# EAGLE board cpNode (EAGLE 7.7.0)
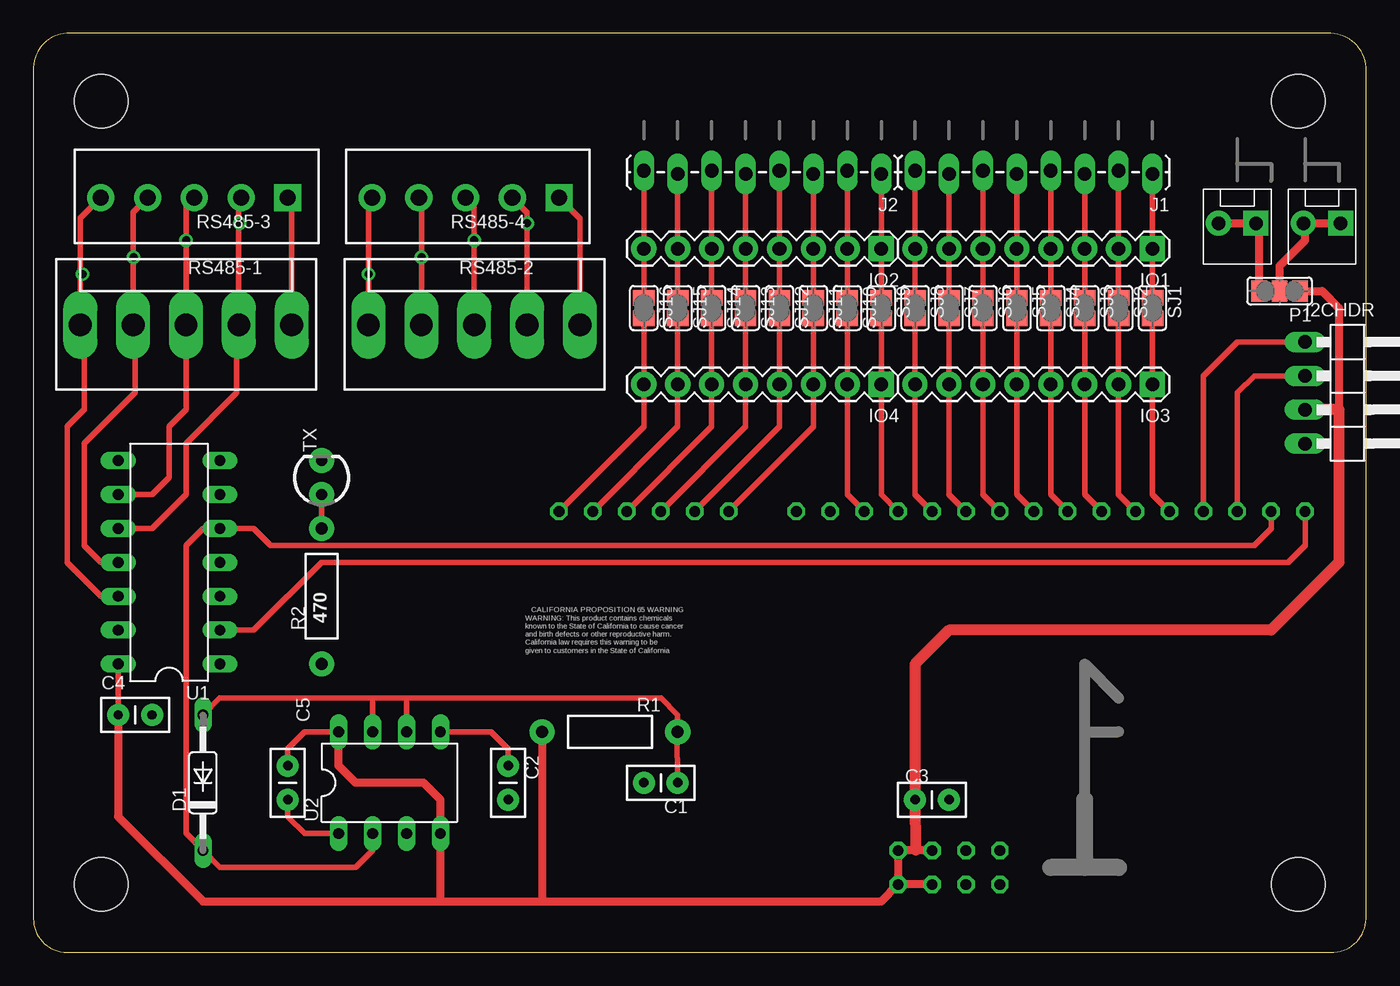
[diagram p0: board, top side]
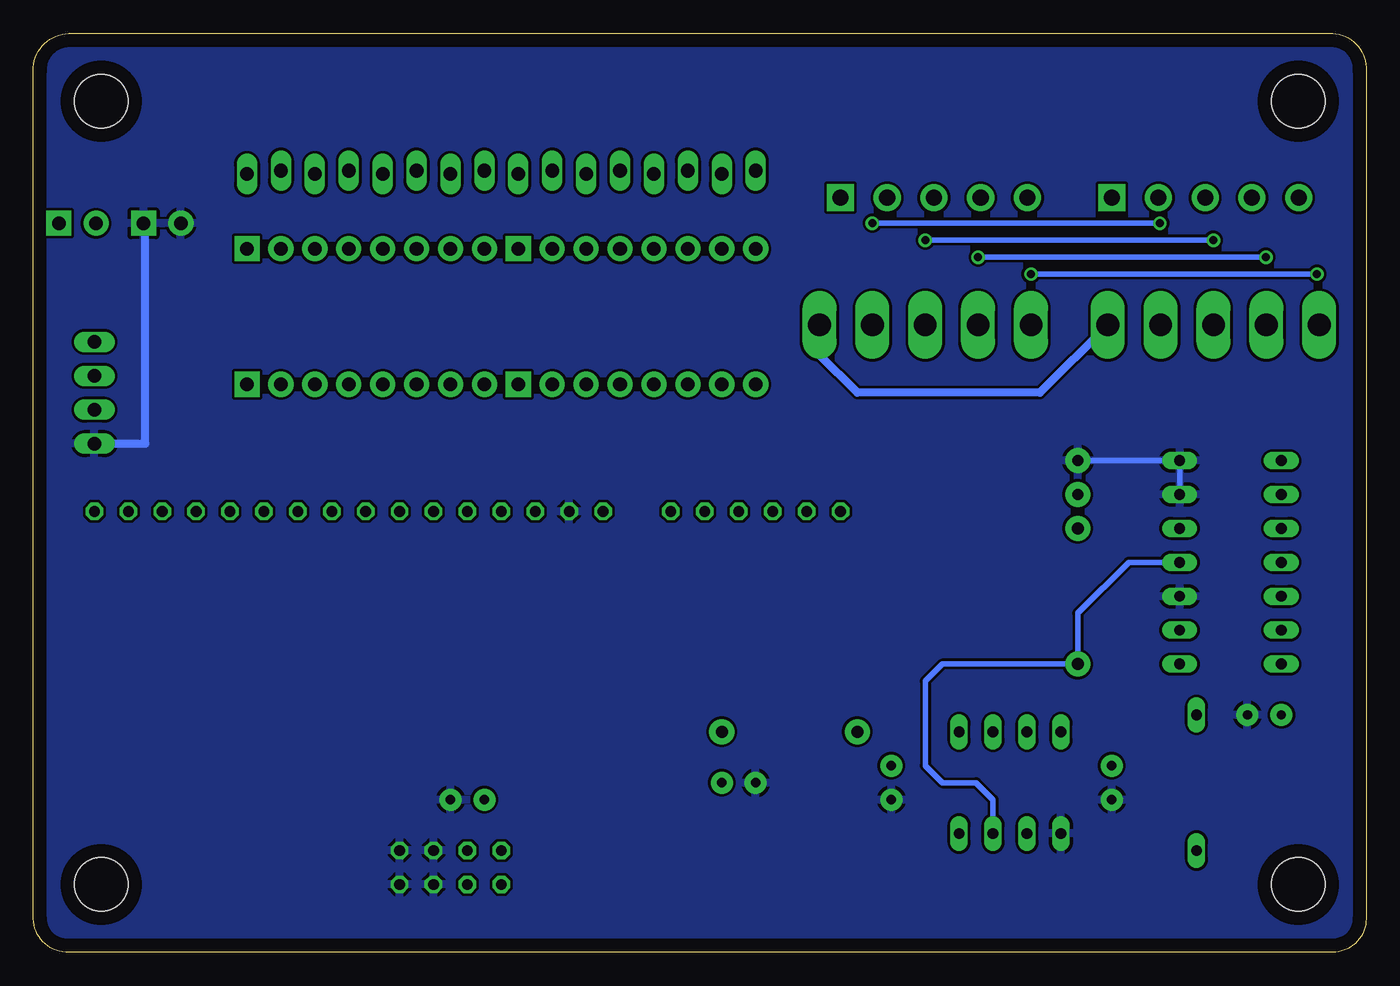
[diagram p1: board, bottom side, seen from below]

Size 99.82 x 68.83 mm. Coordinates in mm from the lower left corner, seen from the top.
Copper layers (1*16): Top 0.035mm / dielectric 1.5mm / Bottom 0.035mm
Design rules "default": minimum track width 10mil, minimum drill 0.6mm, track to track 8mil, track to pad 8mil, pad to pad 8mil, via to via 8mil, smd to smd 8mil, copper to edge 40mil, drill to drill 8mil, minimum pad ring 10mil, minimum via ring 8mil, stop-mask expansion 4mil, vias tented up to drill 0mil, thermal gap 10mil

## Footprints (pad centres in the part's own frame; a part is rotated, then mirrored left to right if it is on the bottom)
ARDUINO-BBLEO = drill 0.8 octagon: +5V@1 40.64,5.08; +5V@2 40.64,2.54; +5V@3 38.1,5.08; +5V@4 38.1,2.54; A0 25.4,30.48; A1 22.86,30.48; A2 20.32,30.48; A3 17.78,30.48; A4 15.24,30.48; A5 12.7,30.48; AR 30.48,30.48; D4 58.42,30.48; D5 55.88,30.48; D6 53.34,30.48; D7 50.8,30.48; D8 48.26,30.48; D9 45.72,30.48; D10 43.18,30.48; D11 40.64,30.48; D12 38.1,30.48; D13 35.56,30.48; GND@0 33.02,30.48; GND@1 43.18,5.08; GND@2 45.72,5.08; GND@3 43.18,2.54; GND@4 45.72,2.54; RX 68.58,30.48; SCL 60.96,30.48; SDA 63.5,30.48; TX 66.04,30.48
BOARD-DINRAIL-2.71IN-MRCS = hole 4: 94.742,5.08; 5.08,63.754; 94.742,63.754; 5.08,5.08
CAP-PTH-SMALL2 = drill 0.7 pad 1.651: 1 0,0; 2 2.54,0
DO35-10 = drill 0.813 long: A 5.08,0; C -5.08,0
MOLEX-1X2_LOCK = drill 1.016 pad 1.88 square: 1 -0.127,0 | drill 1.016 pad 1.88: 2 2.667,0
1X04/90 = drill 1.016 long: 1 -3.81,-3.81; 2 -1.27,-3.81; 3 1.27,-3.81; 4 3.81,-3.81
1X08 = drill 1.016 pad 1.88 square: 1 0,0 | drill 1.016 pad 1.88: 2 2.54,0; 3 5.08,0; 4 7.62,0; 5 10.16,0; 6 12.7,0; 7 15.24,0; 8 17.78,0
1X08_LOCK_LONGPADS = drill 1.016 long: 1 0,0.127; 2 2.54,-0.127; 3 5.08,0.127; 4 7.62,-0.127; 5 10.16,0.127; 6 12.7,-0.127; 7 15.24,0.127; 8 17.78,-0.127
3P-SMD-2X4.8 = smd 1.168 x 1.6: 1 -1.524,0; 2 0,0; 3 1.524,0
AXIAL-0.4 = drill 0.9 pad 1.88: P$1 -5.08,0; P$2 5.08,0
KK-156-5 = drill 1.7 pad 2.184 long: 1 -7.92,0; 2 -3.96,0; 3 0,0; 4 3.96,0; 5 7.92,0
CMRINET-3.5MM = drill 1.2 pad 2.032: 1 -6.38,0; 2 -2.88,0; 3 0.62,0; 4 4.12,0 | drill 1.2 pad 2.032 square: 5 7.62,0
SJ = smd 1.168 x 1.6: 1 -0.762,0; 2 0.762,0
LED3MM = drill 0.813 pad 1.88: A -1.27,0; K 1.27,0
DIL14 = drill 0.813 long: 1 -7.62,-3.81; 2 -5.08,-3.81; 3 -2.54,-3.81; 4 0,-3.81; 5 2.54,-3.81; 6 5.08,-3.81; 7 7.62,-3.81; 8 7.62,3.81; 9 5.08,3.81; 10 2.54,3.81; 11 0,3.81; 12 -2.54,3.81; 13 -5.08,3.81; 14 -7.62,3.81
DIL-08 = drill 0.813 long: 1 -3.81,-3.81; 2 -1.27,-3.81; 3 1.27,-3.81; 4 3.81,-3.81; 5 3.81,3.81; 6 1.27,3.81; 7 -1.27,3.81; 8 -3.81,3.81

## Placement (x,y rotation side)
BBLEO  [ARDUINO-BBLEO]  26.67,2.54 0 top
BOARD1  BOARD69X100MRCS  [BOARD-DINRAIL-2.71IN-MRCS]  0,0 0 top
C1  0.1uF  [CAP-PTH-SMALL2]  48.26,12.7 180 top
C2  .01uF  [CAP-PTH-SMALL2]  35.56,13.97 270 top
C3  .01uF  [CAP-PTH-SMALL2]  66.04,11.43 0 top
C4  .01uF  [CAP-PTH-SMALL2]  6.35,17.78 0 top
C5  .01uF  [CAP-PTH-SMALL2]  19.05,13.97 270 top
D1  1N4148DO35-10  [DO35-10]  12.7,12.7 90 top
GND  [MOLEX-1X2_LOCK]  91.44,54.61 180 top
I2CHDR  [1X04/90]  99.06,41.91 270 top
IO1  [1X08]  83.82,52.7 180 top
IO2  [1X08]  63.5,52.7 180 top
IO3  [1X08]  83.82,42.55 180 top
IO4  [1X08]  63.5,42.55 180 top
J1  [1X08_LOCK_LONGPADS]  83.82,58.42 180 top
J2  [1X08_LOCK_LONGPADS]  63.5,58.42 180 top
LEDCOM  [MOLEX-1X2_LOCK]  97.79,54.61 180 top
P1  CA CC  [3P-SMD-2X4.8]  93.35,49.53 180 top
R1  [AXIAL-0.4]  43.18,16.51 180 top
R2  470  [AXIAL-0.4]  21.59,26.67 90 top
RS485-1  Molex  [KK-156-5]  11.43,46.99 0 top
RS485-2  Molex  [KK-156-5]  33.02,46.99 0 top
RS485-3  3.5mm  [CMRINET-3.5MM]  11.43,56.52 0 top
RS485-4  3.5mm  [CMRINET-3.5MM]  31.75,56.52 0 top
SJ1  [SJ]  83.82,48.26 270 top
SJ2  [SJ]  81.28,48.26 270 top
SJ3  [SJ]  78.74,48.26 270 top
SJ4  [SJ]  76.2,48.26 270 top
SJ5  [SJ]  73.66,48.26 270 top
SJ6  [SJ]  71.12,48.26 270 top
SJ7  [SJ]  68.58,48.26 270 top
SJ8  [SJ]  66.04,48.26 270 top
SJ9  [SJ]  63.5,48.26 270 top
SJ10  [SJ]  60.96,48.26 270 top
SJ11  [SJ]  58.42,48.26 270 top
SJ12  [SJ]  55.88,48.26 270 top
SJ13  [SJ]  53.34,48.26 270 top
SJ14  [SJ]  50.8,48.26 270 top
SJ15  [SJ]  48.26,48.26 270 top
SJ16  [SJ]  45.72,48.26 270 top
TX  [LED3MM]  21.59,35.56 90 top
U1  MAX3465CPD  [DIL14]  10.16,29.21 90 top
U2  NE555P  [DIL-08]  26.67,12.7 0 top
U$1  CREATIVE_COMMONS  [CREATIVE_COMMONS]  17.78,-11.43 0 top  (outside the outline)
U$2  CA-PROP65WARNING  [CA-PROP65WARNING]  43.18,24.13 0 top
U$3  [MRCS-LOGO]  78.74,6.35 0 top

## Library data of the parts
BBLEO BOARD1 J1 J2 RS485-1-RS485-4 U$3 = SPCoast
C1-C5 GND IO1-IO4 LEDCOM R1 R2 U$1 = SparkFun
D1 = diode
I2CHDR = pinhead
P1 = Discreter
SJ1-SJ16 = jumper
TX = SparkFun-LED
U1 = maxim; MPN: MAX3465CPD+; OC_FARNELL: unknown; OC_NEWARK: 42M5444
U2 = SparkFun; MF: Arrow Electronics; MPN: NE555N; OC_FARNELL: 1467742; OC_NEWARK: 89K1486
U$2 = MRCS-prop65warningTop

## Nets
A0: BBLEO.A0 IO4.3 SJ11.2
A1: BBLEO.A1 IO4.4 SJ12.2
A2: BBLEO.A2 IO4.5 SJ13.2
A3: BBLEO.A3 IO4.6 SJ14.2
A4: BBLEO.A4 IO4.7 SJ15.2
A5: BBLEO.A5 IO4.8 SJ16.2
AREF: BBLEO.AR
D2: BBLEO.SDA I2CHDR.2
D3: BBLEO.SCL I2CHDR.1
D4: BBLEO.D4 IO3.1 SJ1.2
D5: BBLEO.D5 IO3.2 SJ2.2
D6: BBLEO.D6 IO3.3 SJ3.2
D7: BBLEO.D7 IO3.4 SJ4.2
D8: BBLEO.D8 IO3.5 SJ5.2
D9: BBLEO.D9 IO3.6 SJ6.2
D10: BBLEO.D10 IO3.7 SJ7.2
D11: BBLEO.D11 IO3.8 SJ8.2
D12: BBLEO.D12 IO4.1 SJ9.2
D13: BBLEO.D13 IO4.2 SJ10.2
GND: BBLEO.GND@0 BBLEO.GND@1 BBLEO.GND@2 BBLEO.GND@3 BBLEO.GND@4 C1.2 C2.2 C3.2 C4.2 C5.2 GND.1 GND.2 I2CHDR.4 P1.3 TX.K U1.3 U1.6 U1.7 U2.1
N$1: IO1.2 J1.2 SJ2.1
N$2: IO1.1 J1.1 SJ1.1
N$3: IO1.3 J1.3 SJ3.1
N$4: IO1.4 J1.4 SJ4.1
N$5: IO1.5 J1.5 SJ5.1
N$6: IO1.6 J1.6 SJ6.1
N$7: IO1.7 J1.7 SJ7.1
N$8: IO1.8 J1.8 SJ8.1
N$9: IO2.1 J2.1 SJ9.1
N$10: IO2.2 J2.2 SJ10.1
N$21: IO2.4 J2.4 SJ12.1
N$29: R2.P$2 TX.A
N$30: IO2.5 J2.5 SJ13.1
N$31: IO2.6 J2.6 SJ14.1
N$32: IO2.7 J2.7 SJ15.1
N$33: IO2.8 J2.8 SJ16.1
N$38: C2.1 U2.5
N$43: IO2.3 J2.3 SJ11.1
N$45: LEDCOM.1 LEDCOM.2 P1.2
N$52: C1.1 D1.A R1.P$1 U2.6 U2.7
N$54: R2.P$1 U1.4 U2.3
R+: RS485-1.1 RS485-2.1 RS485-3.1 RS485-4.1 U1.12
R-: RS485-1.2 RS485-2.2 RS485-3.2 RS485-4.2 U1.11
RX: BBLEO.RX U1.2
SHIELD: RS485-1.5 RS485-2.5 RS485-3.5 RS485-4.5
T+: RS485-1.3 RS485-2.3 RS485-3.3 RS485-4.3 U1.9
T-: RS485-1.4 RS485-2.4 RS485-3.4 RS485-4.4 U1.10
TX: BBLEO.TX D1.C U1.5 U2.2
VCC: BBLEO.+5V@1 BBLEO.+5V@2 BBLEO.+5V@3 BBLEO.+5V@4 C3.1 C4.1 C5.1 I2CHDR.3 P1.1 R1.P$2 U1.14 U2.4 U2.8

## Tracks (layer width: path | path; a pad name or v marks a point on that pad's centre or on a via)
A0
  Top 0.406: SJ11.2 IO4.3 58.42,39.37 BBLEO.A0
A1
  Top 0.406: SJ12.2 IO4.4 55.88,39.37 BBLEO.A1
A2
  Top 0.406: SJ13.2 IO4.5 53.34,39.37 BBLEO.A2
A3
  Top 0.406: SJ14.2 50.8,43.18 IO4.6 50.8,39.37 BBLEO.A3
A4
  Top 0.406: SJ15.2 IO4.7 48.26,39.37 BBLEO.A4
A5
  Top 0.406: SJ16.2 IO4.8 45.72,39.37 BBLEO.A5
D2
  Top 0.406: I2CHDR.2 91.44,43.18 90.17,41.91 BBLEO.SDA
D3
  Top 0.406: I2CHDR.1 90.17,45.72 87.63,43.18 BBLEO.SCL
D4
  Top 0.406: SJ1.2 IO3.1 83.82,34.29 BBLEO.D4
D5
  Top 0.406: SJ2.2 IO3.2 81.28,34.29 BBLEO.D5
D6
  Top 0.406: SJ3.2 IO3.3 78.74,34.29 BBLEO.D6
D7
  Top 0.406: SJ4.2 IO3.4 76.2,34.29 BBLEO.D7
D8
  Top 0.406: SJ5.2 IO3.5 73.66,34.29 BBLEO.D8
D9
  Top 0.406: SJ6.2 IO3.6 71.12,34.29 BBLEO.D9
D10
  Top 0.406: SJ7.2 IO3.7 68.58,34.29 BBLEO.D10
D11
  Top 0.406: SJ8.2 IO3.8 66.04,34.29 BBLEO.D11
D12
  Top 0.406: SJ9.2 IO4.1 63.5,34.29 BBLEO.D12
D13
  Top 0.406: SJ10.2 IO4.2 60.96,34.29 BBLEO.D13
GND
  Top 0.406: 91.82,54.23 GND.1 | C5.2 19.05,10.16 20.32,8.89 U2.1
  Top 0.61: GND.2 GND.1 | P1.3 91.82,54.23
  Bottom 0.406: TX.K U1.7 U1.6
  Bottom 0.61: I2CHDR.4 91.44,38.1 91.44,54.61 GND.1
  pour Bottom: 0,68.58 99.7,68.58 99.7,6.99 99.7,0 0,0
N$1
  Top 0.406: SJ2.1 IO1.2 J1.2
N$2
  Top 0.406: SJ1.1 IO1.1 J1.1
N$3
  Top 0.406: SJ3.1 IO1.3 J1.3
N$4
  Top 0.406: SJ4.1 IO1.4 J1.4
N$5
  Top 0.406: SJ5.1 IO1.5 J1.5
N$6
  Top 0.406: SJ6.1 IO1.6 J1.6
N$7
  Top 0.406: SJ7.1 IO1.7 J1.7
N$8
  Top 0.406: SJ8.1 IO1.8 J1.8
N$9
  Top 0.406: SJ9.1 IO2.1 J2.1
N$10
  Top 0.406: SJ10.1 IO2.2 J2.2
N$21
  Top 0.406: SJ12.1 IO2.4 J2.4
N$29
  Top 0.406: TX.A R2.P$2
N$30
  Top 0.406: SJ13.1 IO2.5 J2.5
N$31
  Top 0.406: SJ14.1 IO2.6 J2.6
N$32
  Top 0.406: SJ15.1 IO2.7 J2.7
N$33
  Top 0.406: SJ16.1 IO2.8 J2.8
N$38
  Top 0.406: U2.5 34.29,16.51 35.56,15.24 C2.1
N$43
  Top 0.406: SJ11.1 IO2.3 J2.3
N$45
  Top 0.406: 95.25,54.48 LEDCOM.2
  Top 0.61: 94.62,49.53 P1.2 93.35,51.44 95.25,53.34 95.25,54.48 | LEDCOM.2 LEDCOM.1
N$52
  Top 0.406: C1.1 48.22,16.47 R1.P$1 48.26,17.78 46.99,19.05 27.94,19.05 | D1.A 13.97,19.05 25.4,19.05 | 25.4,19.05 27.94,19.05 | 27.94,19.05 U2.6 | U2.7 25.4,19.05
N$54
  Bottom 0.406: U1.4 17.78,29.21 21.59,25.4 R2.P$1 31.75,21.59 33.02,20.32 33.02,13.97 31.75,12.7 29.21,12.7 27.94,11.43 U2.3
R+  (via drill 0.6)
  Top 0.406: 3.51,50.63 3.51,54.98 RS485-3.1 | 3.51,50.63 RS485-1.1 3.81,46.69 3.81,40.64 2.54,39.37 2.54,29.21 5.08,26.67 U1.12 | RS485-4.1 25.1,56.24 v25.1,50.8 RS485-2.1 | 3.51,50.63 v3.68,50.8
  Bottom 0.406: v3.68,50.8 v25.1,50.8
R-  (via drill 0.6)
  Top 0.406: 7.47,52.1 7.47,55.44 RS485-3.2 | 7.47,52.1 RS485-1.2 7.62,46.84 7.62,41.91 3.81,38.1 3.81,30.48 5.08,29.21 U1.11 | RS485-4.2 29.06,56.33 v29.06,52.07 RS485-2.2 | 7.47,52.1 v7.5,52.07
  Bottom 0.406: v7.5,52.07 v29.06,52.07
RX
  Top 0.406: BBLEO.RX 95.25,30.48 93.98,29.21 21.59,29.21 16.51,24.13 U1.2
SHIELD
  Top 0.406: RS485-1.5 19.35,56.22 RS485-3.5 | RS485-4.5 40.94,54.95 RS485-2.5
  Bottom 0.61: RS485-1.5 24.43,41.91 38.1,41.91 40.94,44.75 RS485-2.5
T+  (via drill 0.6)
  Top 0.406: RS485-4.3 33.02,55.87 v33.02,53.34 RS485-2.3 | RS485-3.3 11.43,55.9 v11.43,53.34 RS485-1.3 11.43,40.64 10.16,39.37 10.16,35.56 8.89,34.29 U1.9
  Bottom 0.406: v11.43,53.34 v33.02,53.34
T-  (via drill 0.6)
  Top 0.406: 15.39,54.67 15.39,56.35 RS485-3.4 | 15.39,54.67 RS485-1.4 15.24,46.84 15.24,41.91 11.43,38.1 11.43,34.29 8.89,31.75 U1.10 | RS485-4.4 36.98,55.41 v36.98,54.61 RS485-2.4 | 15.39,54.67 v15.45,54.61
  Bottom 0.406: v15.45,54.61 v36.98,54.61
TX
  Top 0.406: BBLEO.TX 92.71,31.75 91.44,30.48 17.78,30.48 16.51,31.75 U1.5 12.7,31.75 11.43,30.48 11.43,8.89 D1.C 13.97,6.35 24.13,6.35 25.4,7.62 U2.2
VCC
  Top 0.406: U1.14 C4.1 | C5.1 19.05,15.24 20.32,16.51 U2.8
  Top 0.61: P1.1 96.52,49.53 97.79,48.26 97.79,40.64 | BBLEO.+5V@1 66.04,7.62 | 66.04,7.62 BBLEO.+5V@3 BBLEO.+5V@4 | BBLEO.+5V@2 BBLEO.+5V@4 | 66.08,7.66 66.04,7.62 | C4.1 6.35,10.16 12.7,3.81 30.48,3.81 | 30.48,3.81 38.1,3.81 | 38.1,3.81 63.5,3.81 BBLEO.+5V@4 | 30.48,3.81 U2.4 30.48,11.43 29.21,12.7 24.13,12.7 22.86,13.97 U2.8 | R1.P$2 38.1,3.81 | 66.04,11.47 C3.1
  Top 0.813: I2CHDR.3 97.79,40.64 97.79,29.21 92.71,24.13 68.58,24.13 66.04,21.59 66.04,11.47 | C3.1 66.08,7.66

## Text on the board
tDocu: A5 | A4 | A3 | A2 | A1 | A0 | D13 | D12 | D11 | D10 | D9 | D8 | D7 | D6 | D5 | D4 | GND | LED | Com | cpNode | MRCS Design | Control Point Node | v2.5Cp | 2019-07